# Altium PCB relayKecil.PcbDoc
Units mil, origin at the board's own origin, x right, y up, seen from the top; angles counter-clockwise.
Board outline 860 x 915 mil, 2 copper layers (Top Layer, Bottom Layer); 6 components, 7 nets, 25 pads, 0 vias.
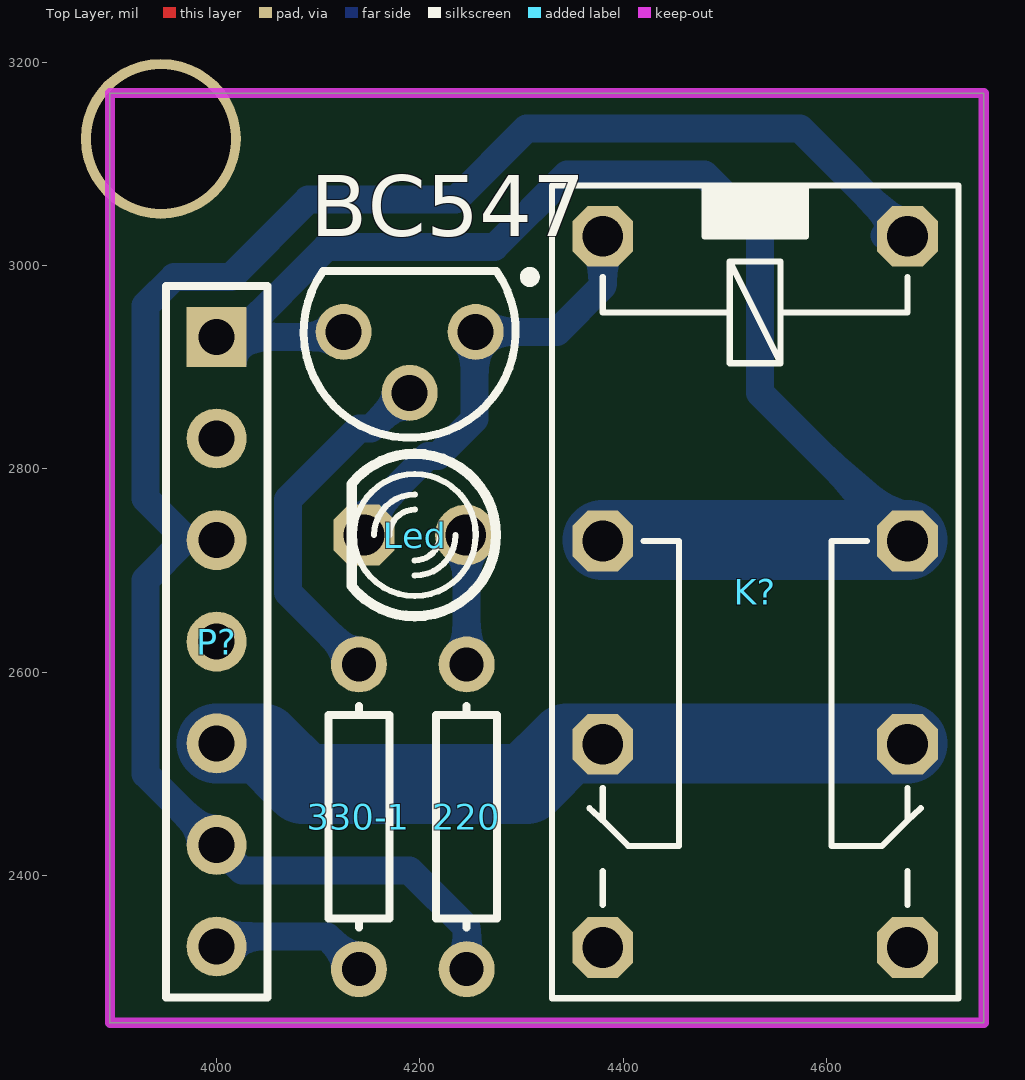
[diagram p0: Top Layer view]
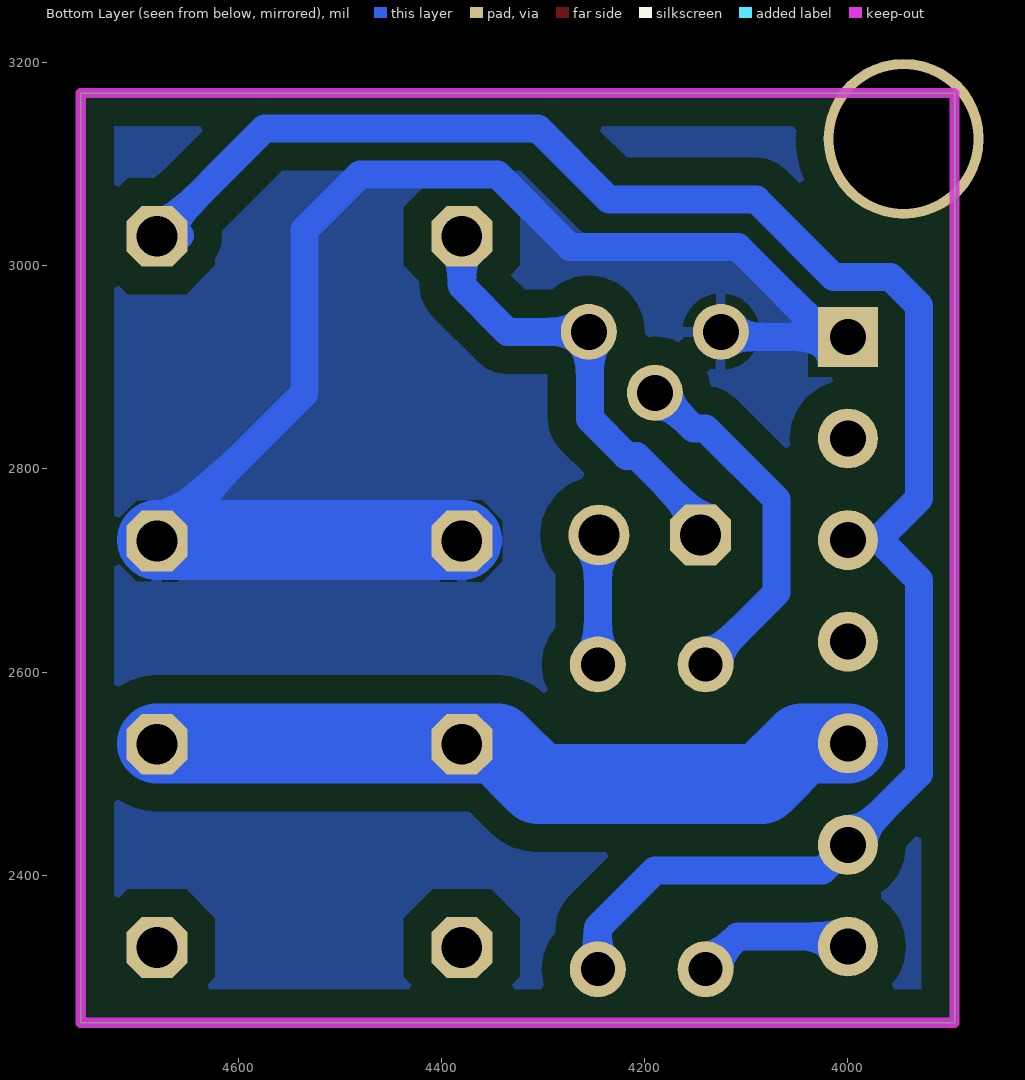
[diagram p1: Bottom Layer view, seen from below]

## Layer stack, top to bottom
Top Solder: solder mask 0.4, Solder Resist, Dk 3.5
Top Layer: signal copper 1.4
Dielectric 1: dielectric 12.6, FR-4, Dk 4.8
Bottom Layer: signal copper 1.4
Bottom Solder: solder mask 0.4, Solder Resist, Dk 3.5

## Board outline
3895,2255 3895,3170 4755,3170 4755,2255

## Design rules (kind name [scope] priority, off if disabled: settings)
Clearance [All] p1: gap=11.81
PolygonConnect [All] p1: connectstyle=Relief reliefconductorwidth=10 reliefentries=4 polygonreliefangle="90 Angle" airgapwidth=10
RoutingVias [All] p1: holewidth=28 width=50 viastyle="Through Hole" minholewidth=28 minwidth=50 maxholewidth=28 maxwidth=50
SolderMaskExpansion [All] p1: expansion=4
Width [All] p1: maxlimit=78.74 minlimit=27.56 preferedwidth=27.56
30 further rules are at their usual default settings.

## Components (designator, comment, footprint, x,y, rotation, side; value= is the part's Value field where it differs from the comment)
220 "Res1" AXIAL-0.3 4246.13,2457.62 r90 top
330-1 "Res1" AXIAL-0.3 4140,2457.62 r90 top
BC547 "NPN" TO-226-AA 4190,2935 r90 top
K? "Relay-DPDT" My_REL_cochick 4530,2879.07 r270 top
Led "LED" My_LED3MM 4195,2735 r180 top
P? "Header 7" HDR1X7 4000,2930 r270 top

## Footprints (in the part's own frame and the unit in brackets; to place one, negate y for a bottom-side part, rotate by r counter-clockwise, add the part's x,y. Pads: shape width x height; smd on the part's side, far side on the other; paste and mask are expansions set on the pad)
AXIAL-0.3 [mm] "Axial Device, Thru-Hole; 2 Leads; 0.3 in Pin Spacing"
  round 1.4 hole 0.85: 1(-3.81,0) 2(3.81,0)
  silkscreen extent -2.77,-0.76 2.77,0.76
HDR1X7 [mm] "Connector; Header; 7 Position"
  rect 1.5x1.5 hole 0.9: 1(0,0)
  round 1.5 hole 0.9: 2(2.54,0) 3(5.08,0) 4(7.62,0) 5(10.16,0) 6(12.7,0) 7(15.24,0)
  silkscreen extent -1.27,-1.27 16.51,1.27
My_LED3MM [mil]
  round 60 hole 40: A(-50,0)
  oct 60x60 hole 40: K(50,0)
  silkscreen extent -80,-80 62,80
My_REL_cochick [mil]
  oct 60x60 hole 40: 1(-150,-150) 2(-150,150) O1(350,-150) O2(350,150) P1(150,-150) P2(150,150) S1(550,-150) S2(550,150)
  silkscreen extent -200,-200 600,200
TO-226-AA [mm] "TO, Flat Index; 3 In-Line, Axial Leads; Body Dia. 4.8mm; Leads 0.55 x 0.51 mm (max)"
  round 1.4 hole 0.9: 1(0,-1.651) 2(-1.524,0) 3(0,1.651)
  silkscreen extent -2.65,-3.13 1.52,2.65, body extent -2.66,-2.66 1.52,2.66, height 5.33

## Part data
220 330-1: "Resistor"
BC547: "NPN Bipolar Transistor"
K?: "Dual-Pole Dual-Throw Relay"
Led: "Typical INFRARED GaAs LED"
P?: "Header, 7-Pin"

## Free pads (board coordinates)
  round 157.48 hole 137.8: 1(3945,3125)

## Nets (pads, with @x,y where several pads share a name; then routed paths per layer and width w, separated by ;. In a path a pad name is that pad's centre, name@x,y a point inside that pad or via, vN(x,y) a via of type N, cw(c..) or ccw(c..) an arc to the next point about the centre after c; other vN are vias at no path point)
+5: 220.1 K?.2 P?.3 P?.6 | length 1801.8
  Bottom Layer w27.56: 220.1@4246.13,2308.56 4246.13,2348.87 4190,2405 4025,2405 P?.6 3930,2500 3930,2690.94 3970,2730.94 3930,2770.94 3930,2960.82 3958.24,2989.06 4014.06,2989.06 4090,3065 4235,3065 4305,3135 4574.06,3135 K?.2 ; K?.2@4657.21,3030 K?.2@4680,3030
GND: BC547.3 K?.P1 K?.P2 P?.1 | length 1392.8
  Bottom Layer w27.56: P?.1 BC547.3@4125,2930 ; P?.1@4020.94,2930.94 4108.25,3018.25 4273.25,3018.25 4345,3090 4480,3090 4535,3035 4535,2875 K?.P2@4680,2730
  Bottom Layer w78.74: K?.P1@4380,2730 K?.P2@4680,2730
Net220_2: 220.2 Led.A | length 126.4
  Bottom Layer w27.56: 220.2@4246.13,2608.56 Led.A@4246.13,2735
Net330-1_1: 330-1.1 P?.7 | length 157.2
  Bottom Layer w27.56: P?.7 4010,2340 4108.56,2340 330-1.1@4140,2308.56
Net330-1_2: 330-1.2 BC547.2 | length 353.8
  Bottom Layer w27.56: 330-1.2@4140,2608.56 4070,2678.56 4070,2770 4140,2840 4152,2840 BC547.2@4189,2877
NetBC547_1: BC547.1 K?.1 Led.K | length 440.3
  Bottom Layer w27.56: Led.K@4137.5,2742.5 4208,2813 4218,2813 4254,2849 4254,2935 4335,2935 4380,2980 K?.1
NetK?_O1: K?.O1 K?.O2 P?.5 | length 713.1
  Bottom Layer w78.74: P?.5 4045,2530 4085,2490 4305,2490 4345,2530 4380,2530 K?.O2@4680,2530
pads on no net: K?.S1 K?.S2 P?.2 P?.4

## Polygon pours and split planes (outlines as drawn)
GND on Bottom Layer "Bottom Layer-GND" (solid, pour order 5): 3895,2255 3895,3170 4755,3170 4755,2255 3895,2255

## Keep-outs
Keep-Out Layer:
  the board outline again, w10

## Dimensions
4755,3170 to 4755,2255 on Keep-Out Layer
3895,2255 to 4755,2255 on Keep-Out Layer